# Altium PCB ballbot_motor_discrete_v22.PcbDoc
Units mil, origin at the board's own origin, x right, y up, seen from the top; angles counter-clockwise.
Board outline 1970 x 1970 mil, 4 copper layers (Top Layer, Mid-Layer 1, Mid-Layer 2, Bottom Layer), stack 68.592 mil thick; 60 components, 44 nets, 252 pads, 97 vias.
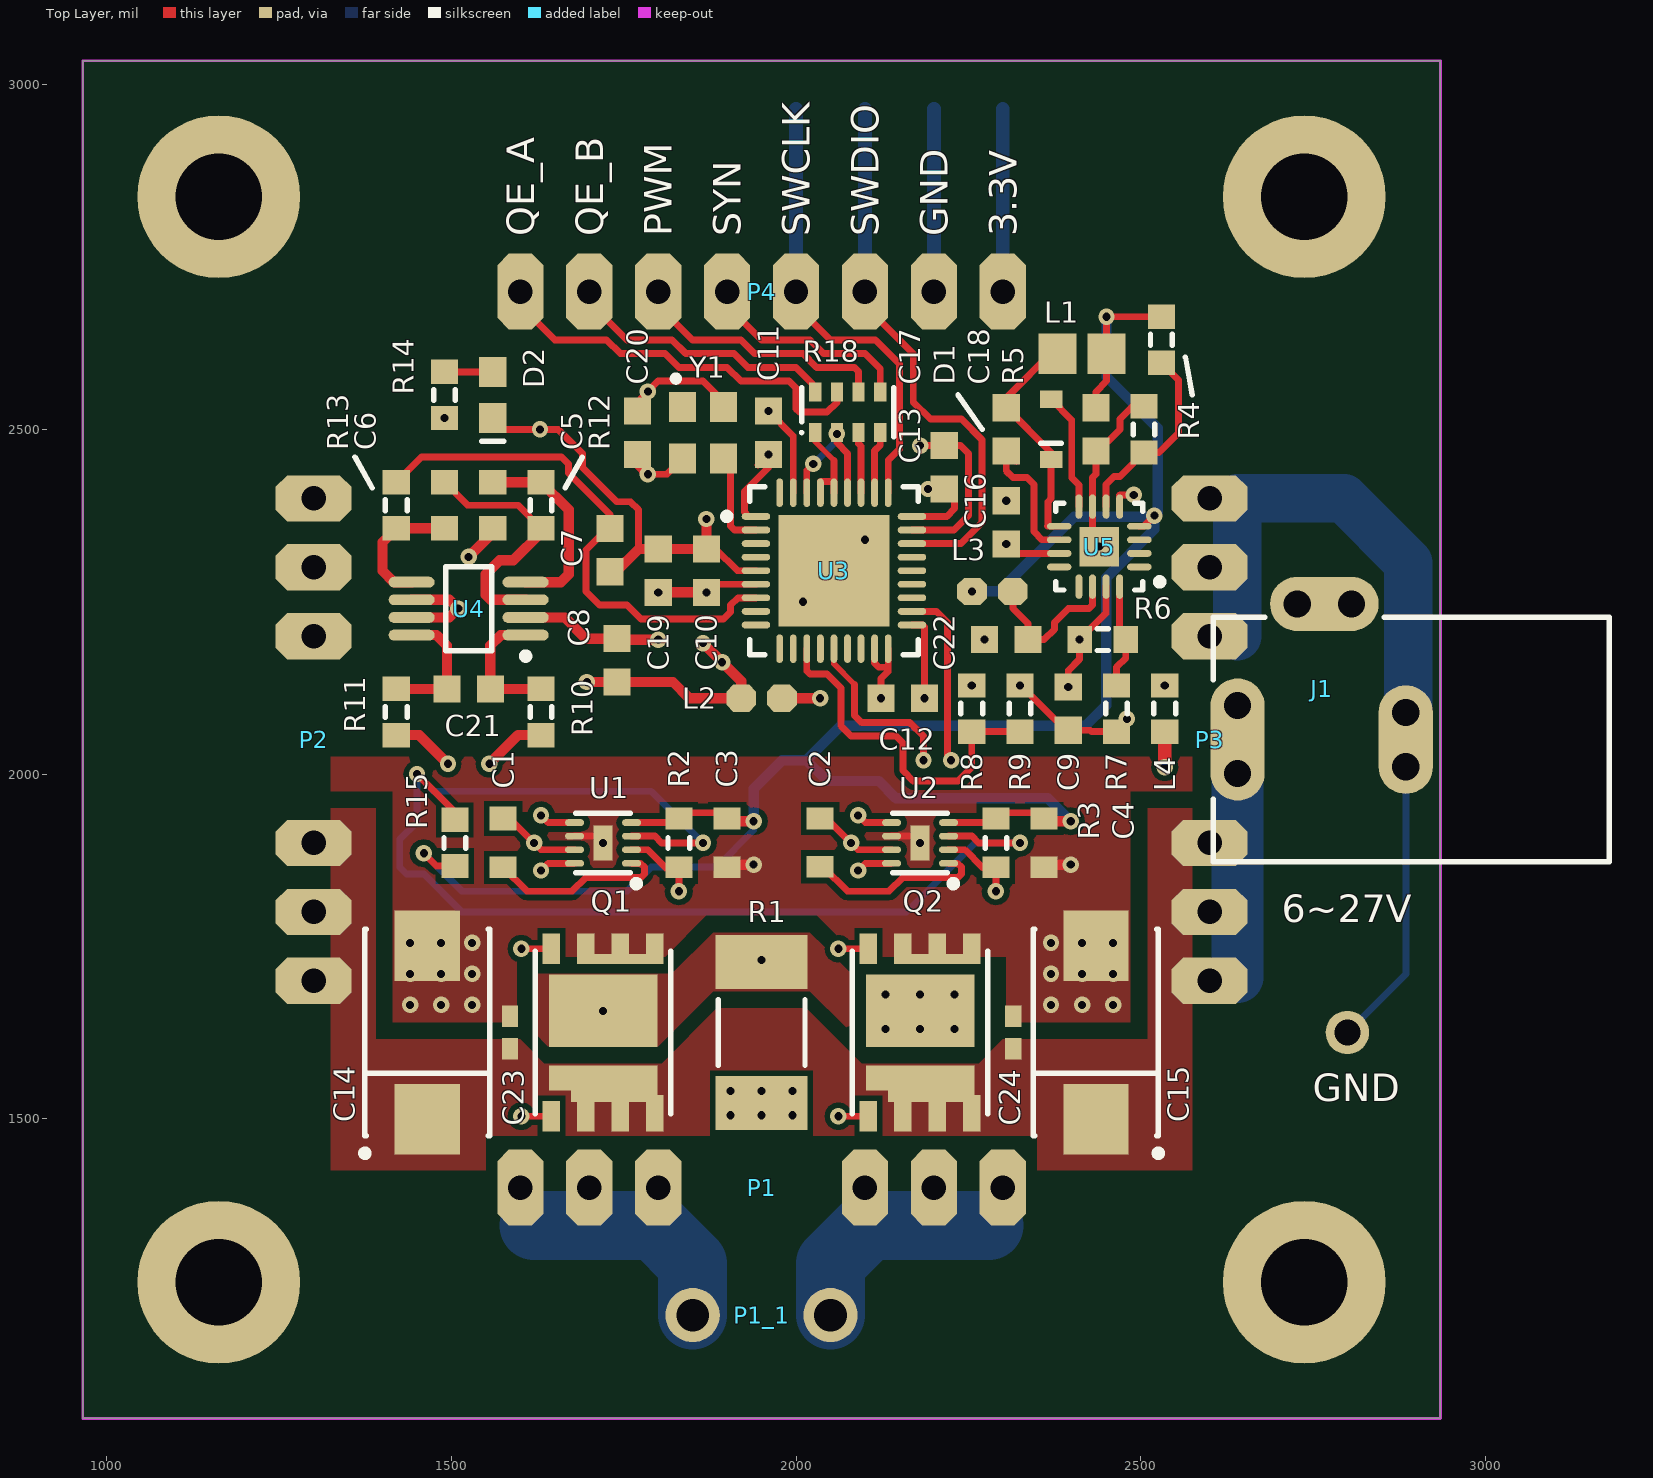
[diagram p0: Top Layer view]
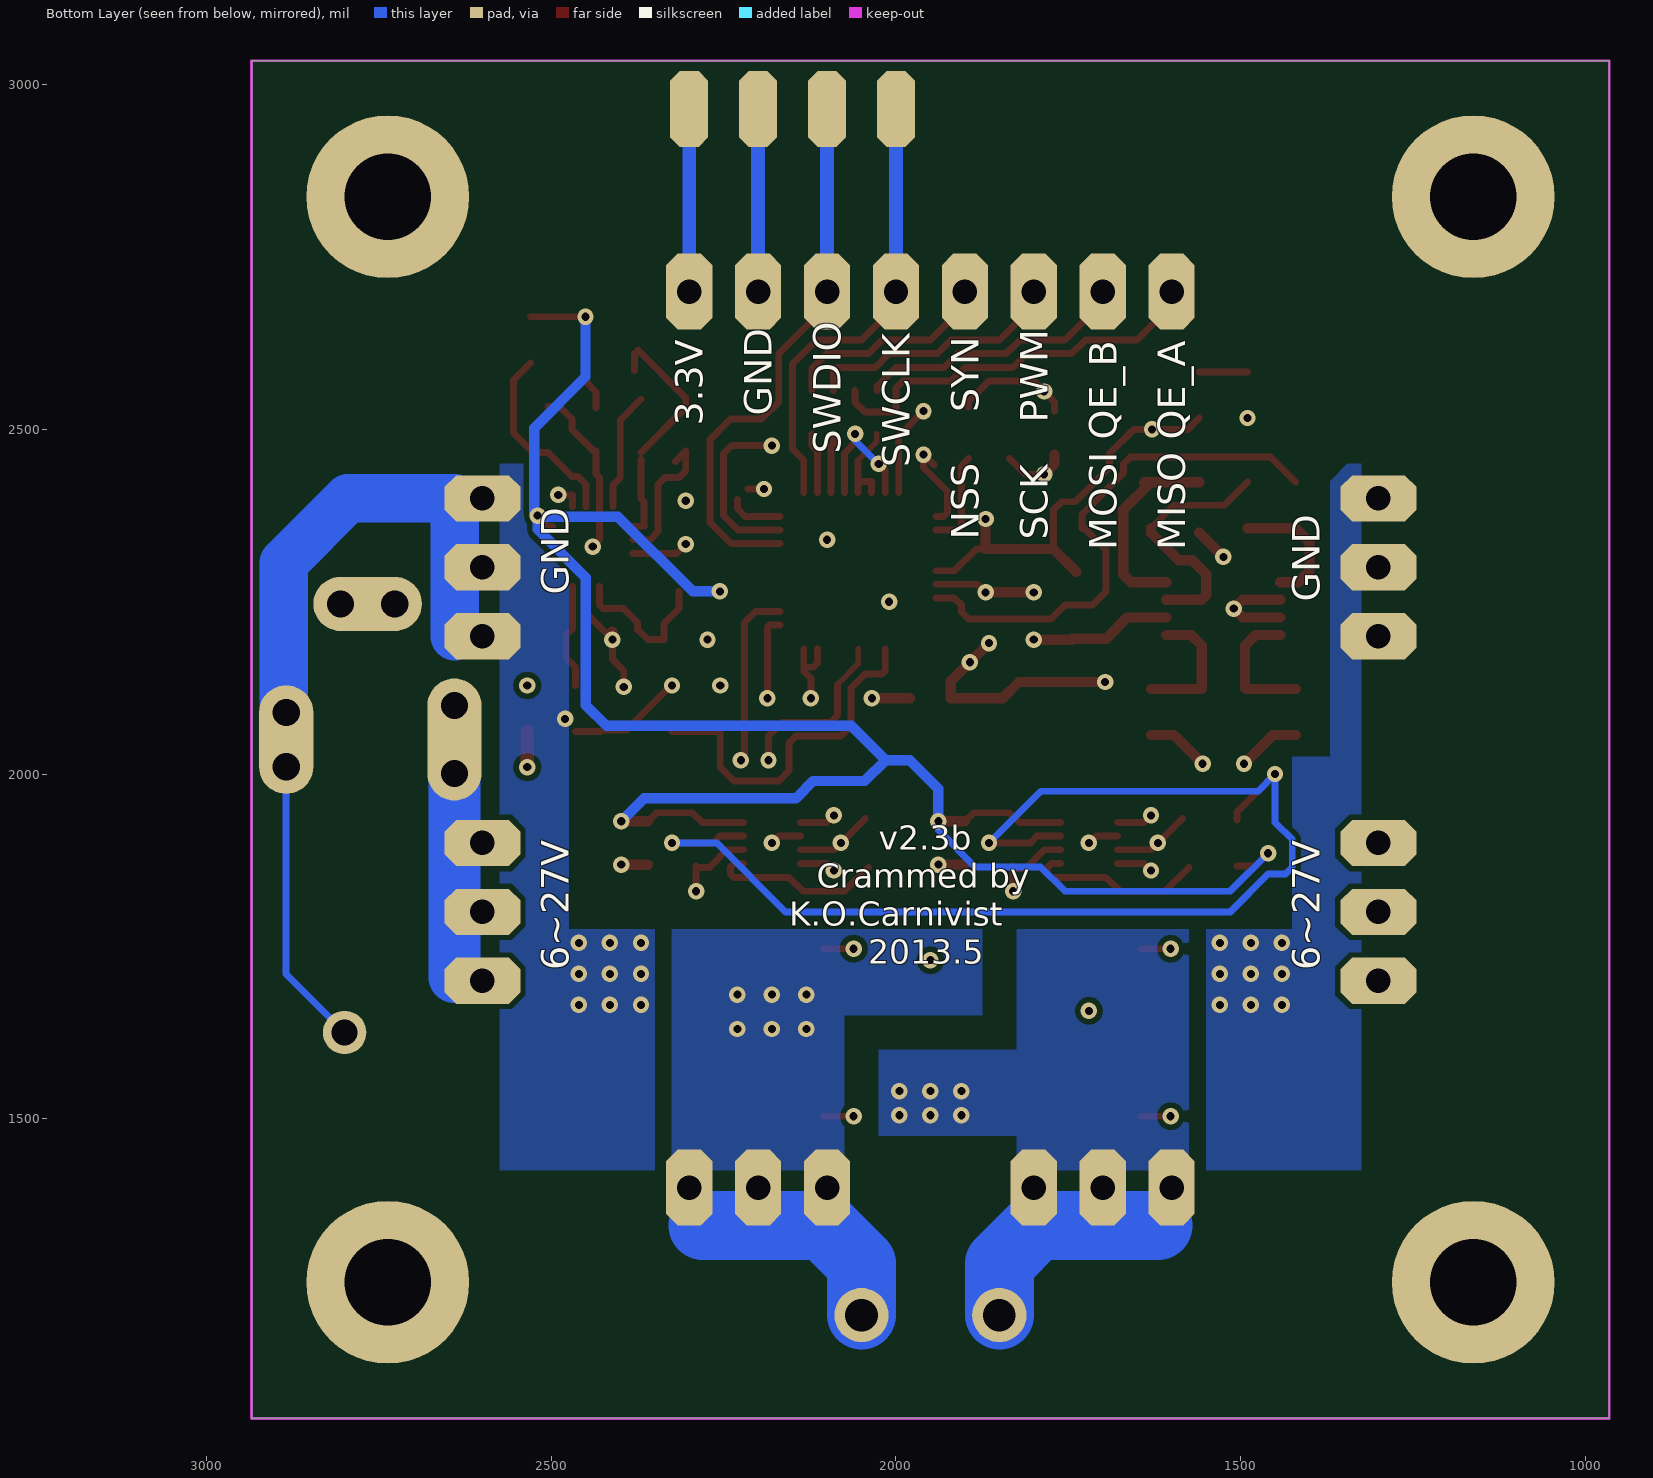
[diagram p1: Bottom Layer view, seen from below]
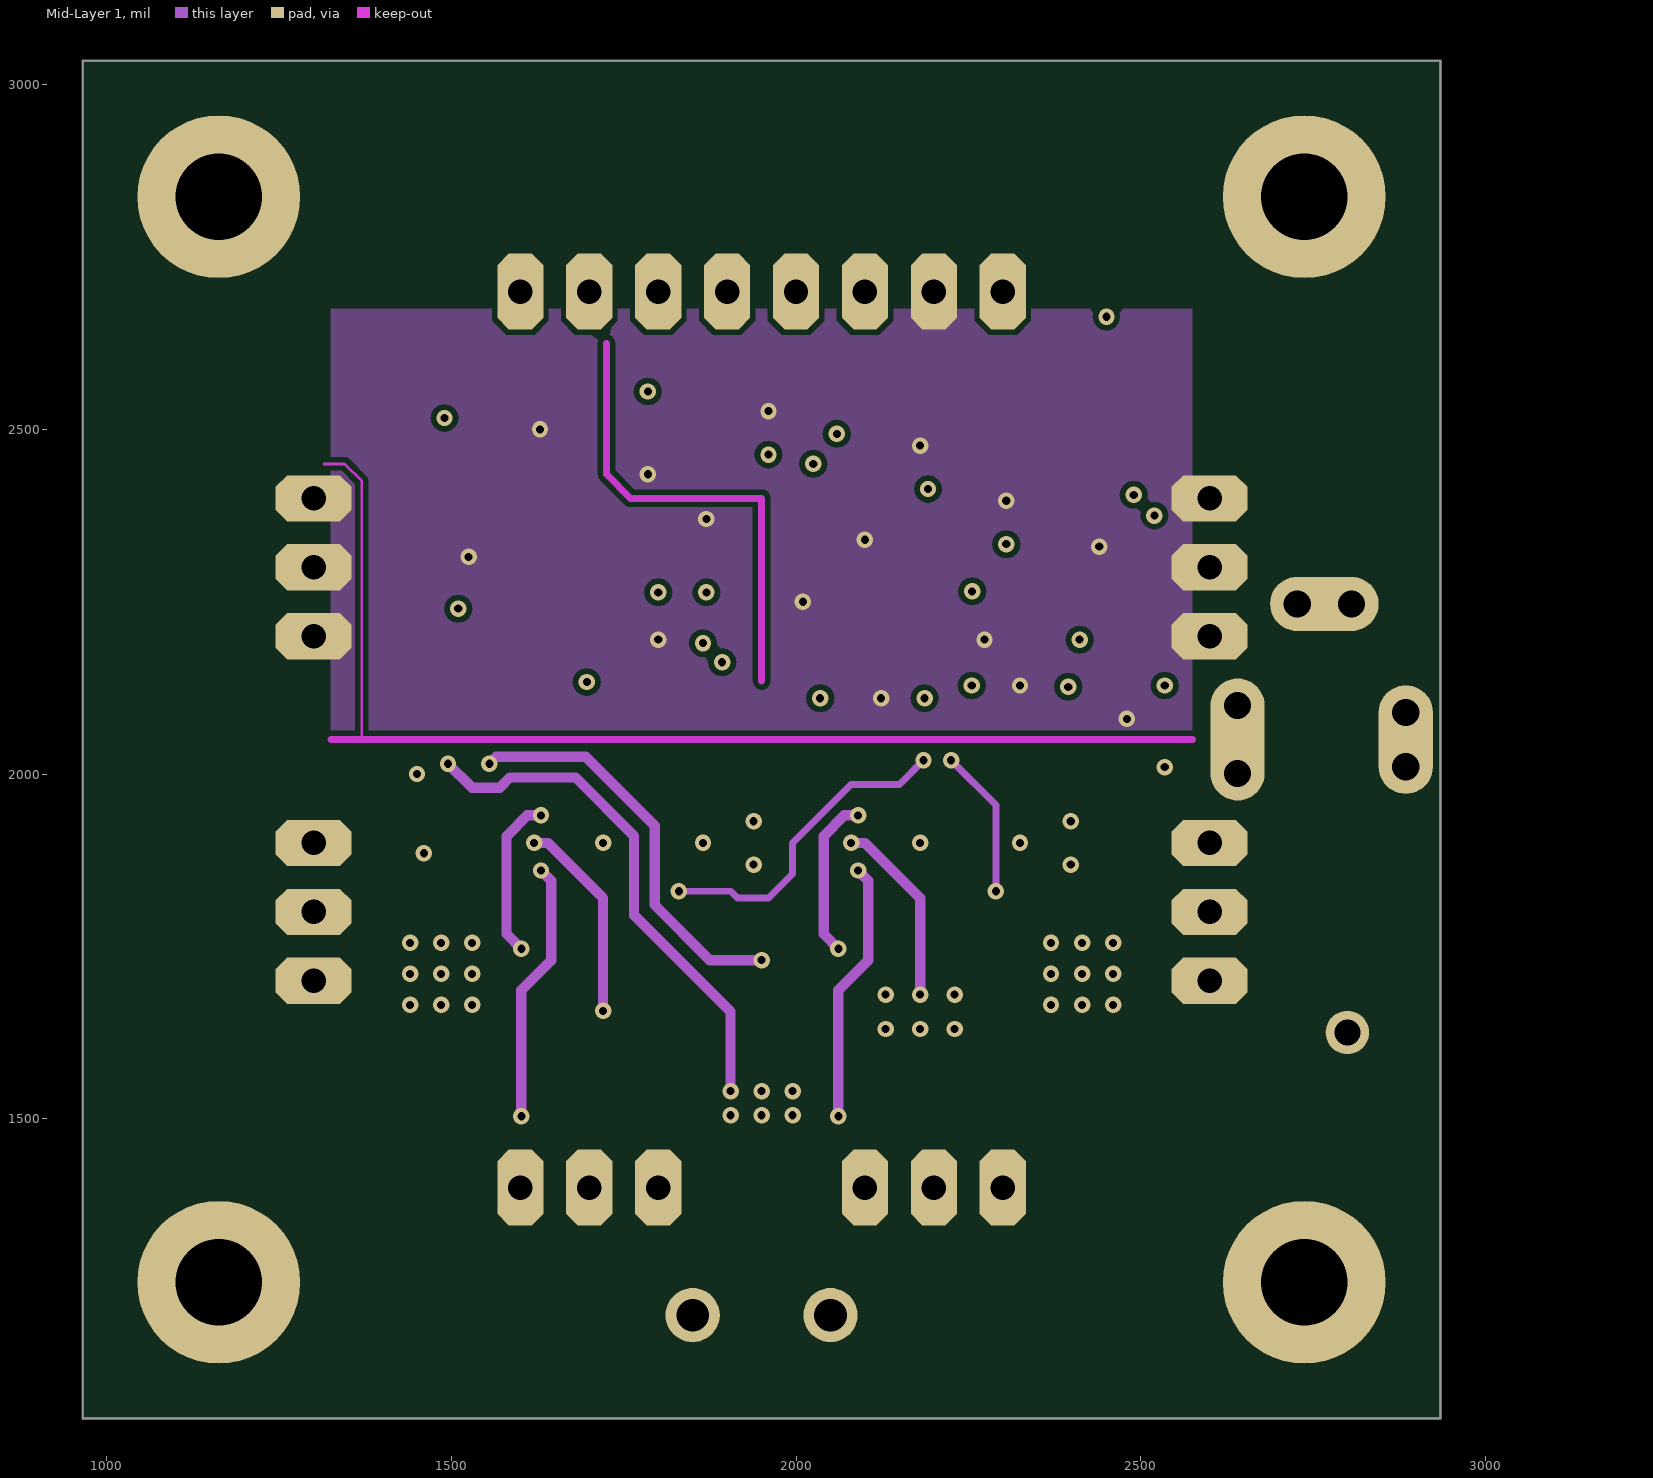
[diagram p2: Mid-Layer 1]
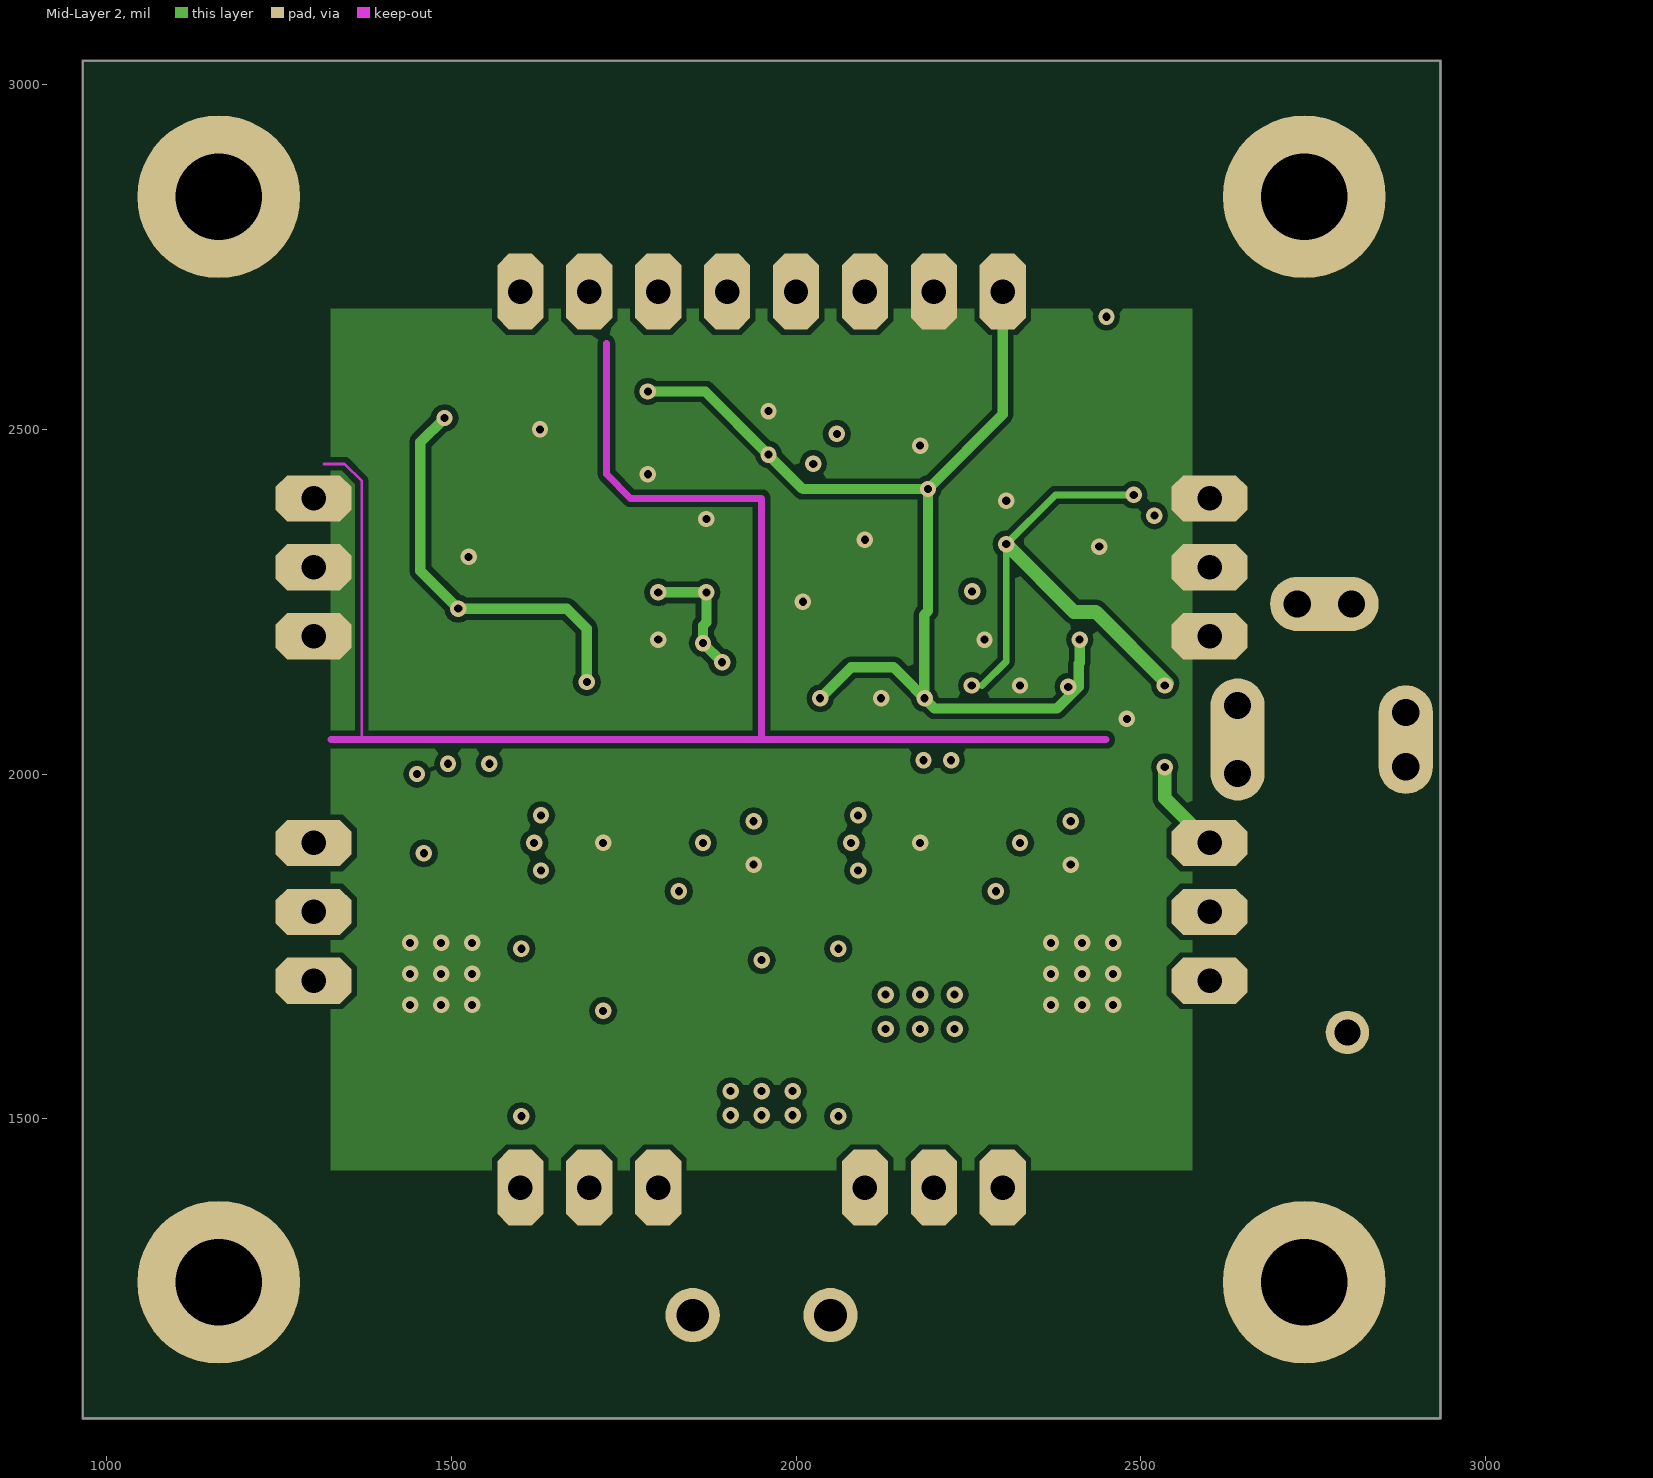
[diagram p3: Mid-Layer 2]

## Layer stack, top to bottom
Top Layer: signal copper 1.4
Dielectric: core 19.685, FR-4, Dk 4.8
Mid-Layer 1: signal copper 1.4
Dielectric: prepreg 23.622, FR-4, Dk 4.8
Mid-Layer 2: signal copper 1.4
Dielectric: core 19.685, FR-4, Dk 4.8
Bottom Layer: signal copper 1.4

## Board outline
965,1065 965,3035 2935,3035 2935,1065

## Design rules (kind name [scope] priority, off if disabled: settings)
Clearance [All] p1: gap=8
ComponentClearance [All] p1: gap=0 collisioncheckmode=3 verticalgap=0 showdistances=FALSE
PolygonConnect PolygonConnect_Motor [(InNet('NetP1_1') OR InNet('NetP1_7')  OR          InNet('VS')       OR InNet('GND'))] p1: connectstyle=Direct reliefconductorwidth=10 reliefentries=4 polygonreliefangle="90 Angle"
PolygonConnect [All] p2: connectstyle=Direct reliefconductorwidth=10 reliefentries=4 polygonreliefangle="90 Angle"
RoutingVias [All] p1: holewidth=28 width=50 viastyle="Through Hole" minholewidth=11.81 minwidth=25 maxholewidth=28 maxwidth=50
SilkscreenOverComponentPads [All] p1: minsilkscreentomaskgap=10
SolderMaskExpansion [All] p1: expansion=4
Width [All] p1: maxlimit=100 minlimit=6 preferedwidth=10
26 further rules are at their usual default settings.

## Components (designator, comment, footprint, x,y, rotation, side; value= is the part's Value field where it differs from the comment)
C1 "Cap Semi" CAPC1608N#1 1575,1900 r270 top
C2 "Cap Semi" CAPC1608N#2 2035,1900 r270 top
C3 "Cap Semi" CAPC1608N#3 1900,1900 r90 top
C4 "Cap Semi" CAPC1608N#3 2360,1900 r90 top
C5 "Cap Semi" CAPC1608N#4 1560,2390 r90 top
C6 "Cap Semi" CAPC1608N#4 1490,2390 r90 top
C7 "Cap Semi" CAPC1608N#5 1730,2325 r90 top
C8 "Cap Semi" CAPC1608N#5 1740,2165 r270 top
C9 "Cap Semi" CAPC1608N#5 2395,2095 r90 top
C10 "Cap Semi" CAPC1608N#5 1870,2295 r270 top
C11 "Cap Semi" CAPC1608N#5 1960,2495 r270 top
C12 "Cap Semi" CAPC1608N#5 2155,2110 r0 top
C13 "Cap Semi" CAPC1608N#5 2215,2445 r270 top
C14 "Cap Pol3" TC7343-2917 1465,1625 r90 top
C15 "Cap Pol3" TC7343-2917 2435,1625 r90 top
C16 "Cap Semi" CAPC1608N#5 2305,2365 r270 top
C17 "Cap Semi" CAPC1608N#5 2305,2500 r270 top
C18 "Cap Semi" CAPC1608N#5 2435,2500 r90 top
C19 "Cap Semi" CAPC1608N#5 1800,2295 r270 top
C20 "Cap Semi" CAPC1608N#5 1770,2495 r90 top
C21 "Cap Semi" CAPC1608N#5 1525,2123.47 r180 top
C22 "Cap Semi" CAPC1608N#5 2305,2195 r0 top
C23 "Cap Semi" CAPC1005N 1585,1625 r270 top
C24 "Cap Semi" CAPC1005N 2315,1625 r270 top
D1 "1N5819" SOD323 2370,2500 r270 top
D2 "LED2" CD1608-0603 1560,2550 r270 top
J1 "PWR2.5" KLD-0202 3180,2050 r180 top
L1 "Inductor" INDC2012N 2415,2610 r0 top
L2 "Bead" INDC1608AN 1950,2110 r180 top
L3 "Bead" INDC1608AN 2285,2265 r180 top
L4 "" RESC1608N#1 2535,2095 r90 top
P1 "MOTOR" "2.54mm * 8-6 Edge" 1950,1400 r0 top
P1_1 "Header 2" 508x2 1950,1215 r0 top
P2 "POWER" "2.54mm * 8-6 Edge" 1300,2050 r270 top
P3 "POWER" "2.54mm * 8-6 Edge" 2600,2050 r90 top
P4 "IO" "2.54mm * 8 Edge" 1950,2700 r180 top
Q1 "FDMS7602" DFN56 1720,1625 r0 top
Q2 "FDMS7602" DFN56 2180,1625 r0 top
R1 "" RESC6432N 1950,1625 r270 top
R2 "" RESC1608N#2 1830,1900 r270 top
R3 "" RESC1608N#2 2290,1900 r270 top
R4 "" RESC1608N#1 2530,2630 r270 top
R5 "" RESC1608N#1 2505,2500 r90 top
R6 "" RESC1608N#1 2445,2195 r0 top
R7 "" RESC1608N#1 2465,2095 r270 top
R8 "" RESC1608N#1 2255,2095 r270 top
R9 "" RESC1608N#1 2325,2095 r90 top
R10 "" RESC1608N#1 1630,2090 r90 top
R11 "" RESC1608N#1 1420,2090 r90 top
R12 "" RESC1608N#1 1630,2390 r270 top
R13 "" RESC1608N#1 1420,2390 r270 top
R14 "" RESC1608N#1 1490,2550 r90 top
R15 "" RESC1608N#1 1505,1900 r90 top
R18 "49.9R" EXBV8V 2075,2525 r0 top
U1 "NCP5911" SON50P200X200X80-8N 1720,1900 r180 top
U2 "NCP5911" SON50P200X200X80-8N 2180,1900 r180 top
U3 "STM32F103T8U6" VFQN36_N_STM32 2055,2295 r0 top
U4 "LMP8602" TSOP65P490-8AN 1525,2240 r180 top
U5 "LT3645" QFN50P300X300-16W7N 2440,2330 r180 top
Y1 "12MHz" "XTAL 2520" 1865,2495 r270 top

## Footprints (in the part's own frame and the unit in brackets; to place one, negate y for a bottom-side part, rotate by r counter-clockwise, add the part's x,y. Pads: shape width x height; smd on the part's side, far side on the other; paste and mask are expansions set on the pad)
"2.54mm * 8 Edge" [mm]
  oct 1.7x2.8 hole 0.9: 1(-8.89,0) 2(-6.35,0) 3(-3.81,0) 4(-1.27,0) 5(1.27,0) 6(3.81,0) 7(6.35,0) 8(8.89,0)
"2.54mm * 8-6 Edge" [mm]
  oct 1.7x2.8 hole 0.9: 1(-8.89,0) 2(-6.35,0) 3(-3.81,0) 4(3.81,0) 5(6.35,0) 6(8.89,0)
508x2 [mm]
  round 2 hole 1.2: 1(-2.54,0) 2(2.54,0)
CAPC1005N [mm] "Chip Capacitor, Body 1.0x0.5mm, IPC Medium Density"
  rect 0.8x0.6 smd: 1(-0.6,0) 2(0.6,0)
  body extent -0.55,-0.3 0.55,0.3, height 0.6
CAPC1608N#1 [mm] "Chip Capacitor, Body 1.6x0.8mm, IPC Medium Density"
  rect 0.873x1 smd: 1(-0.902,0)
  rect 0.797x1 smd: 2(0.902,0)
  body extent -0.87,-0.48 0.87,0.48, height 0.85
CAPC1608N#2 [mm] "Chip Capacitor, Body 1.6x0.8mm, IPC Medium Density"
  rect 0.797x1 smd: 1(-0.902,0) 2(0.876,0)
  body extent -0.87,-0.48 0.87,0.48, height 0.85
CAPC1608N#3 [mm] "Chip Capacitor, Body 1.6x0.8mm, IPC Medium Density"
  rect 0.797x1 smd: 1(-0.902,0) 2(0.902,0)
  body extent -0.87,-0.48 0.87,0.48, height 0.85
CAPC1608N#4 [mm] "Chip Capacitor, Body 1.6x0.8mm, IPC Medium Density"
  rect 0.898x1 smd: 1(-0.851,0) 2(0.851,0)
  body extent -0.87,-0.48 0.87,0.48, height 0.85
CAPC1608N#5 [mm] "Chip Capacitor, Body 1.6x0.8mm, IPC Medium Density"
  rect 1x1 smd: 1(-0.8,0) 2(0.8,0)
  body extent -0.87,-0.48 0.87,0.48, height 0.85
CD1608-0603 [mm] "Chip Diode; Body 1.6 x 0.8 mm (LxW typ)"
  rect 1.1x1 smd: 1(-0.85,0) 2(0.85,0)
  silkscreen extent 1.7,-0.4 1.7,0.4
DFN56 [mm]
  rect 0.65x1.34 smd mask+0.051: D1(-0.635,-2.98) D1(0.635,-2.98) D1(1.905,-2.98)
  rect 4x0.92 smd mask+0.051: D1(0,-1.67)
  rect 3.18x0.44 smd mask+0.051: D1(0.41,-2.34)
  rect 0.65x1.13 smd mask+0.051: G1(-1.905,-3.085) G2(-1.905,3.085) S2(-0.635,3.085) S2(0.635,3.085) S2(1.905,3.085)
  rect 4x2.67 smd mask+0.051: S1D2(0,0.795)
  rect 3.19x0.38 smd mask+0.051: S2(0.635,2.71)
  silkscreen extent -2.5,-3 2.5,3, body extent -2.5,-3 2.5,3, height 0.9
EXBV8V [mm] "Chip Resistor Array, (0603x4); SM; 8 Leads; Body 3.40 x 1.80 mm (LxW max)"
  rect 0.45x0.7 smd mask+0.051: 1(-1.2,-0.75) 2(-0.4,-0.75) 3(0.4,-0.75) 4(1.2,-0.75) 5(1.2,0.75) 6(0.4,0.75) 7(-0.4,0.75) 8(-1.2,0.75)
  silkscreen extent -1.75,-0.9 1.7,0.9
INDC1608AN [mm] "Chip Inductor, Body 1.6x0.8mm, IPC Medium Density"
  oct 1.1x1 smd: 1(-0.75,0) 2(0.75,0)
  body extent -0.9,-0.5 0.9,0.5, height 1
INDC2012N [mm] "Chip Inductor, Body 2.0x1.2mm, IPC Medium Density"
  rect 1.4x1.5 smd: 1(-0.9,0) 2(0.9,0)
  body extent -1.1,-0.7 1.1,0.7, height 1.1
KLD-0202 [mm] "DC Power Jack, 2.5mm, KLD Series, PCB Mount"
  oval 2x4.5 all layers, no hole: 1(13.7,0)
  round 1.5 hole 1: 1A(13.7,-1.25) 1B(13.7,1.25) 2A(7.5,-1) 2B(7.5,1) 3A(9.5,-5) 3B(11.5,-5)
  oval 2x4 all layers, no hole: 2(7.5,0)
  oval 4x2 all layers, no hole: 3(10.5,-5)
  silkscreen extent 0,-4.5 14.6,4.5
QFN50P300X300-16W7N [mm] "QFN, 16-Leads, Body 3x3mm, Pitch 0.5mm, IPC Medium Density"
  oval 0.9x0.25 smd mask+0.051: 1(-1.475,0.75) 2(-1.475,0.25) 3(-1.475,-0.25) 4(-1.475,-0.75) 9(1.475,-0.75) 10(1.475,-0.25) 11(1.475,0.25) 12(1.475,0.75)
  oval 0.25x0.9 smd mask+0.051: 5(-0.75,-1.475) 6(-0.25,-1.475) 7(0.25,-1.475) 8(0.75,-1.475) 13(0.75,1.475) 14(0.25,1.475) 15(-0.25,1.475) 16(-0.75,1.475)
  rect 1.45x1.45 smd mask+0.051: 17(0,0)
  silkscreen extent -2.35,-1.6 1.6,1.6, body extent -1.58,-1.58 1.58,1.58, height 0.8
RESC1608N#1 [mm] "Chip Resistor, Body 1.6x0.8mm, IPC Medium Density"
  rect 0.9x1 smd: 1(-0.85,0) 2(0.85,0)
  silkscreen extent -0.2,-0.4 0.2,0.4, body extent -0.85,-0.48 0.85,0.48, height 0.6
RESC1608N#2 [mm] "Chip Resistor, Body 1.6x0.8mm, IPC Medium Density"
  rect 0.797x1 smd: 1(-0.902,0) 2(0.902,0)
  silkscreen extent -0.2,-0.4 0.2,0.4, body extent -0.85,-0.48 0.85,0.48, height 0.6
RESC6432N [mm] "Chip Resistor, Body 6.4x3.2mm, IPC Medium Density"
  rect 2x3.4 smd: 1(-2.6,0) 2(2.6,0)
  silkscreen extent -1.2,-1.6 1.2,1.6, body extent -3.3,-1.7 3.3,1.7, height 1.2
SOD323 [mm] "Diode SOD323"
  rect 0.63x0.83 smd: 1(-1.112,0) 2(1.112,0)
  silkscreen extent 0.51,-0.38 0.51,0.38, body extent -0.76,-0.51 0.76,0.51, height 1
SON50P200X200X80-8N [mm] "SON, 8-Leads, Body 2x2 mm, Pitch 0.5mm, IPC Medium Density"
  oval 0.7x0.25 smd mask+0.051: 1(-1.05,0.75) 2(-1.05,0.25) 3(-1.05,-0.25) 4(-1.05,-0.75) 5(1.05,-0.75) 6(1.05,-0.25) 7(1.05,0.25) 8(1.05,0.75)
  rect 0.7x1.3 smd mask+0.051: 9(0,0)
  silkscreen extent -1.35,-1.1 1,1.62, body extent -1,-1 1,1, height 0.8
TC7343-2917 [mm] "Capacitor, SM Tantalum; Body 7.3 x 4.3 mm (LxW typ)"
  rect 2.6x2.4 smd: 1(-3.2,0) 2(3.2,0)
  silkscreen extent -4.57,-2.3 3.8,2.42
TSOP65P490-8AN [mm] "TSOP, 8-Leads, Body 3x3mm, Pitch 0.65mm, IPC Medium Density"
  oval 1.7x0.4 smd mask+0.051: 1(-2.1,0.975) 2(-2.1,0.325) 3(-2.1,-0.325) 4(-2.1,-0.975) 5(2.1,-0.975) 6(2.1,-0.325) 7(2.1,0.325) 8(2.1,0.975)
  silkscreen extent -2.22,-1.55 0.85,1.87, body extent -1.6,-1.6 1.6,1.6, height 1.1
VFQN36_N_STM32 [mm] "QFN, 36-Leads, Body 6x6mm, Pitch 0.5mm, IPC Medium Density"
  oval 1.05x0.25 smd mask+0.05: 1(-2.875,2) 2(-2.875,1.5) 3(-2.875,1) 4(-2.875,0.5) 5(-2.875,0) 6(-2.875,-0.5) 7(-2.875,-1) 8(-2.875,-1.5) 9(-2.875,-2) 19(2.875,-2) 20(2.875,-1.5) 21(2.875,-1) 22(2.875,-0.5) 23(2.875,0) 24(2.875,0.5) 25(2.875,1) 26(2.875,1.5) 27(2.875,2)
  oval 0.25x1.05 smd mask+0.05: 10(-2,-2.875) 11(-1.5,-2.875) 12(-1,-2.875) 13(-0.5,-2.875) 14(0,-2.875) 15(0.5,-2.875) 16(1,-2.875) 17(1.5,-2.875) 18(2,-2.875) 28(2,2.875) 29(1.5,2.875) 30(1,2.875) 31(0.5,2.875) 32(0,2.875) 33(-0.5,2.875) 34(-1,2.875) 35(-1.5,2.875) 36(-2,2.875)
  rect 4.1x4.1 smd mask+0.05: 36(0,0)
  silkscreen extent -4.07,-3.1 3.1,3.1, body extent -3.08,-3.08 3.08,3.08, height 1
"XTAL 2520" [mm] "Quartz Crystal, SM; Body 2.5 x 2.0 mm (LxW max)"
  rect 1.1x1 smd: 1(-0.95,-0.75) 2(0.95,-0.75) 3(0.95,0.75) 4(-0.95,0.75)
  silkscreen extent -2.1,-1.1 -1.9,-0.9, body extent -1.25,-1 1.25,1, height 0.6

## Part data
C1 C2 C3 C4 C5 C6 C7 C8 C9 C10 C11 C12 C13 C16 C17 C18 C19 C20 C21 C22 C23 C24: "Capacitor (Semiconductor SIM Model)"
C14 C15: "Polarized Capacitor (Surface Mount)"
D1: library part "D Schottky", "Schottky Diode"
D2: "Typical RED, GREEN, YELLOW, AMBER GaAs LED"
J1: "Low Voltage Power Supply Connector"
L2 L3: library part Inductor, "Inductor"
L4 R1 R2 R3 R4 R5 R6 R7 R8 R9 R10 R11 R12 R13 R14 R15: library part Res2, "Resistor"
P1 P2 P3: library part "Header 6", "Header, 6-Pin"
P1_1: "Header, 2-Pin"
P4: library part "Header 8", "Header, 8-Pin"
Q1 Q2: library part "Dual NMOS"
R18: library part "Header 4X2", "Header, 4-Pin, Dual row"
U3: "STM32 ARM-based 32-bit MCU with 64 Kbytes Flash, 36-pin VFQFPN, Industrial Temperature"
U4: library part LMP8603
Y1: library part Oscillator, "Oscillator"

## Free pads (board coordinates)
  round 236.22 hole 125.98: 0(1162.5,1262.5) 0(1162.5,2837.5) 0(2737.5,1262.5) 0(2737.5,2837.5)
  oct 55.12x110.24 smd far side: 0(2000,2965) 0(2100,2965) 0(2200,2965) 0(2300,2965)
  round 62.99 hole 37.4: 0(2800,1625)

## Via types
v1: diameter 23.81, hole 11.81, Top Layer to Bottom Layer, tented both sides, 97 vias

## Nets (pads, with @x,y where several pads share a name; then routed paths per layer and width w, separated by ;. In a path a pad name is that pad's centre, name@x,y a point inside that pad or via, vN(x,y) a via of type N, cw(c..) or ccw(c..) an arc to the next point about the centre after c; other vN are vias at no path point)
+3.3V: C9.2 C11.2 C12.2 C13.2 C20.2 L2.1 P4.1 pad.0@2300,2965 R6.1 U3.1 U3.19 U3.27 U5.15 Y1.4 | length 2711.2
  Top Layer w10: C20.2 1770,2540 v1(1785,2555) 1800,2570 1865,2570 1894.53,2540.47 Y1.4 ; U3.1 1931.26,2373.74 1925,2380 1925,2410 1960,2445 v1(1960,2463.5) C11.2@1945,2448.5 ; U3.19 2183.74,2216.26 2186.5,2213.5 v1(2186.5,2110) ; U3.27 2218.74,2373.74 2230,2385 C13.2@2230,2398.5 ; v1(2191.5,2413.5) C13.2 ; P4.1@2272.83,2680.47 P4.1@2272.83,2715.91 ; v1(2395,2126.5) 2395,2150 2411.54,2166.54 v1(2411.54,2195) 2449.84,2233.31 U5.15
  Top Layer w15: L2.1 v1(2035,2110)
  Mid-Layer 2 w15: v1(1785,2555) 1868.5,2555 v1(1960,2463.5) 2010,2413.5 v1(2191.5,2413.5) ; v1(2035,2110) 2080,2155 2141.5,2155 2201.5,2095 2378.5,2095 2410,2126.5 2410,2160 2411.54,2161.54 v1(2411.54,2195) ; v1@2185.81,2110 2185.81,2230.81 2191.5,2236.5 v1(2191.5,2413.5) ; P4.1 2300,2522.01 v1(2191.5,2413.5)
  Bottom Layer w10: P4.1@2280,2660 2300,2680 P4.1
  Bottom Layer w20: P4.1 pad.0@2300,2965
+3.3VA: C8.2 C10.2 C19.2 L2.2 R14.1 U3.6 U4.6 U4.7 | length 1403.8
  Top Layer w10: v1(1870,2263.5) 1881.81,2275.32 U3.6
  Top Layer w15: U4.7 1497.2,2227.2 v1(1510,2240) 1497.2,2252.8 U4.6 ; v1(1696.5,2133.5) C8.2 1821.5,2133.5 1845,2110 L2.2 1920.47,2134.53 v1(1892.74,2162.26) v1(1865,2190) ; v1(1800,2263.5) v1(1870,2263.5)
  Mid-Layer 2 w15: v1(1490,2516.54) 1455,2481.54 1455,2295 v1(1510,2240) 1667.2,2240 1696.5,2210.71 v1(1696.5,2133.5) ; v1(1800,2263.5) v1(1870,2263.5) 1870,2220 1865,2215 v1(1865,2190) v1(1892.74,2162.26)
+5V: C3.2 C4.2 C18.2 L1.2 L3.2 R2.1 R3.1 R4.1 R15.1 U1.4 U2.4 U5.4 | length 3190.7
  Top Layer w10: v1(1460,1885) 1478.46,1866.54 R15.1 ; U1.4 1820.73,1929.53 1835,1943.8 1887.7,1943.8 C3.2@1900,1931.5 ; U2.4 2280.73,1929.53 2295,1943.8 2347.7,1943.8 C4.2@2360,1931.5 ; C18.2 2435,2554.57 2450.43,2570 v1(2450.43,2663.47) R4.1 ; U5.4 2504.53,2359.53 v1(2520,2375)
  Top Layer w15: C3.2@1900,1931.5 v1(1938.5,1931.5) ; C4.2@2360,1931.5 v1(2398.5,1931.5)
  Bottom Layer w10: v1(1460,1885) 1515,1830 1755,1830 1790,1865 1885,1865 1938.5,1918.5 v1(1938.5,1931.5)
  Bottom Layer w15: v1(1938.5,1931.5) 1938.5,1978.5 1980,2020 2015,2020 ; v1(2255.47,2265) 2295,2265 2403.5,2373.5 2518.5,2373.5 v1(2520,2375) ; v1(2398.5,1931.5) 2365,1965 2145,1965 2120,1990 2045,1990 2015,2020 ; v1(2450.43,2663.47) 2450.43,2576.1 2525,2501.54 2525,2380 v1(2520,2375) ; 2015,2020 2065,2070 2420,2070 2450,2100 2450,2285 2520,2355 v1(2520,2375)
EN_DRV: R15.2 U1.3 U2.3 | length 1874.9
  Top Layer w10: v1(1450,2000) 1505,1945 R15.2 ; U1.3 1795.16,1909.84 1805,1900 v1(1865,1900) ; U2.3 2255.16,1909.84 2265,1900 v1(2325,1900)
  Bottom Layer w10: v1(1865,1900) 1790,1975 1475,1975 v1(1450,2000) 1450,1930 1425,1905 1425,1865 1435,1855 1460,1855 1515,1800 2160,1800 2260,1900 v1(2325,1900)
ENC_A: R18.2 U3.31 U3.34 | length 195.1
  Top Layer w10: U3.34 2015.63,2440.63 v1(2025,2450) ; v1(2059.25,2493.5) 2059.25,2480.75 2074.68,2465.32 U3.31
  Bottom Layer w10: v1(2025,2450) 2059.25,2484.25 v1(2059.25,2493.5)
ENC_B: R18.1 U3.32 U3.33 | length 132.9
  Top Layer w8: R18.1@2027.76,2493.5 2027.76,2482.24 2055,2455
  Top Layer w10: U3.33 2035.31,2424.69 2054.69,2424.69 U3.32@2055,2425 ; U3.32 U3.32@2055,2425 ; 2055,2455 U3.32@2055,2425
GND: C3.1 C4.1 C5.1 C7.1 C8.1 C9.1 C10.1 C11.1 C12.1 C13.1 C14.2 C15.2 C16.1 C18.1 C19.1 C20.1 C22.1 C23.1 C24.1 D2.2 J1.2 J1.2A J1.2B P2.1 P2.2 P2.3 P3.4 P3.5 P3.6 P4.2 pad.0@2200,2965 pad.0@2800,1625 Q1.S2 Q2.S2 R5.2 R7.2 R9.2 U1.6 U1.9 U2.6 U2.9 U3.5 U3.17 U3.18 U3.26 U3.35 U3.36@2055,2295 U4.2 U5.7 U5.17 Y1.2 | length 3474.3
  Top Layer w10: D2.2 1576.54,2500 v1(1628.46,2500) 1655,2500 1690,2465 1690,2445 1740,2395 1760,2395 1771.5,2383.5 1771.5,2326.5 ; U1.6 U1.9@1710.16,1909.84 ; v1(1785,2435) 1812.87,2435 Y1.2 ; C10.1 1883.5,2326.5 1915,2295 U3.5 ; v1(1960,2526.5) 1995.94,2490.55 U3.35 ; U3.17 2114.06,2160.94 2120,2155 2133.74,2155 ; v1(2123.5,2110) 2123.5,2138.5 2133.74,2148.74 2133.74,2155 ; U3.18 2133.74,2155 ; U2.6 U2.9@2170.16,1909.84 ; U3.26 2229.06,2354.06 2250,2375 2250,2465 2238.5,2476.5 C13.1 v1(2180,2476.5) ; R9.2@2325.77,2129.23 C9.1@2391.5,2063.5 ; C9.1 2426.5,2063.5 2428.46,2061.54 R7.2 ; U5.17@2430.16,2339.84 U5.7 2430.16,2430.16 2435,2435 C18.1 2438.5,2468.5 2470,2500 2470,2515 2488.46,2533.46 R5.2
  Top Layer w15: v1(1525,2315) C5.1@1560,2350 ; U4.2 1664.29,2227.2 1695,2196.5 C8.1@1743.5,2196.5 ; C7.1@1738.5,2293.5 1771.5,2326.5 C19.1 C10.1 v1(1870,2370) ; C8.1@1745,2195 v1(1800,2195) ; C20.1 1770,2450 v1(1785,2435) ; C3.1@1900,1868.5 v1(1938.5,1868.5) ; C4.1@2360,1868.5 v1(2398.5,1868.5)
  Bottom Layer w10: pad.0@2800,1625 2884.72,1709.72 J1.2B
  Bottom Layer w20: P4.2 pad.0@2200,2965
  Bottom Layer w70: P3.4@2640,2200 2640,2400 2795,2400 2888.35,2306.65 2888.35,2014.26 J1.2B
  other v1: 1440,1665 1485,1665 1530,1665 2370,1665 2415,1665 2460,1665 1440,1710 1485,1710 1530,1710 2370,1710 2415,1710 2460,1710 1440,1755 1485,1755 1530,1755 2370,1755 2415,1755 2460,1755 1720,1900 2180,1900 2480,2080 2325,2128.46 2273.5,2195 2010,2250 2440,2330 2100,2340 2305,2396.5
I_CMP: C6.2 R12.2 U4.3 | length 369.8
  Top Layer w10: C6.2 1523.5,2390 1596.54,2390 R12.2
  Top Layer w15: U4.3 1557.2,2252.8 1550,2260 1550,2290 1570,2310 1590,2310 1630,2350 R12.2
I_SENSE: C7.2 R13.1 U3.7 | length 774.1
  Top Layer w10: R13.1 1456.54,2460 1660,2460 1670,2450 1670,2436.5 1730,2376.5 C7.2 ; C7.2@1726.5,2356.5 1695,2325 1695,2265 1715,2245 1755,2245 1775,2225 1895,2225 1905,2235 1905,2245 1915.63,2255.63 U3.7
IS+: C21.2 R11.2 U4.8 | length 190.9
  Top Layer w15: R11.2 C21.2@1491.97,2123.46 ; U4.8 1478.39,2201.61 1493.5,2186.5 C21.2@1493.5,2125
IS-: C21.1 R10.2 U4.1 | length 192.4
  Top Layer w15: C21.1 R10.2 ; C21.1@1556.5,2125 1556.5,2186.5 1571.61,2201.61 U4.1
NetC1_1: C1.1 Q1.S1D2 R1.1 R10.1 U1.7 | length 1090.7
  Top Layer w10: C1.1@1584.5,1935.5 v1(1620,1900) 1629.84,1890.16 U1.7
  Top Layer w15: v1(1555,2015) 1596.54,2056.54 R10.1
  Mid-Layer 1 w15: v1(1555,2015) 1565,2025 1695,2025 1795,1925 1795,1810 1875,1730 v1(1950,1730) ; v1(1620,1900) 1640,1900 1720,1820 v1(1720,1656.3)
NetC1_2: C1.2 U1.1 | length 260.6
  Top Layer w10: C1.2 1609.5,1830 1675,1830 1695,1850 1775,1850 1780,1855 1780,1865 1774.53,1870.47 U1.1
NetC2_1: C2.1 P1.4 P1.5 P1.6 P1_1.2 Q2.S1D2 U2.7 | length 718.4
  Top Layer w10: C2.1@2044.5,1935.5 v1(2080,1900) ; v1@2075.5,1900 v1(2080,1900) ; U2.7 2089.84,1890.16 v1(2080,1900)
  Mid-Layer 1 w15: v1(2080,1900) 2100,1900 2180,1820 v1(2180,1680)
  Bottom Layer w100: P1_1.2 2050,1290 2105,1345 2280,1345
  other v1: 2130,1630 2180,1630 2230,1630 2130,1680 2230,1680
NetC2_2: C2.2 U2.1 | length 255.6
  Top Layer w10: C2.2@2040,1864.5 2074.5,1830 2135,1830 2155,1850 2235,1850 2240,1855 2240,1865 2234.53,1870.47 U2.1
NetC5_2: C5.2 R12.1 U4.4 | length 297.2
  Top Layer w15: C5.2 R12.1@1639.97,2423.5 ; U4.4 1658.39,2278.39 1670,2290 1670,2383.46 R12.1
NetC6_1: C6.1 R13.2 U4.5 | length 189
  Top Layer w15: U4.5 1416.61,2278.39 1400,2295 1400,2336.47 R13.2 C6.1
NetC17_1: C17.1 D1.2 L1.1 U5.9 | length 344.5
  Top Layer w10: U5.9@2365,2360 U5.9@2365.47,2359.53 ; D1.2 2370,2399.53 2365.47,2395 U5.9@2365.47,2359.53 ; D1.2@2370,2466.5 C17.1 2305,2545.43 L1.1@2374.57,2615 ; L1.1@2379.57,2585.43 L1.1 ; U5.9 U5.9@2365.47,2359.53
NetC17_2: C17.2 U5.10 | length 208.1
  Top Layer w10: C17.2@2320,2453.5 C17.2 2305,2440 2315,2430 2335,2430 2345,2420 2345,2351.77 2356.93,2339.84 U5.10
NetC22_2: C22.2 L3.1 U5.14 | length 226.2
  Top Layer w10: L3.1 2314.53,2240.47 2336.5,2218.5 C22.2 2360,2195 2375,2210 2375,2220 2395,2240 2425,2240 2430.16,2245.16 U5.14
NetD1_1: D1.1 U5.8 | length 172.5
  Top Layer w10: D1.1 2400,2513.8 2400,2430 2410.47,2419.53 U5.8
NetD2_1: D2.1 R14.2 | length 70
  Top Layer w10: R14.2 D2.1
NetJ1_3: J1.3 J1.3A J1.3B
NetP1_1: P1.1 P1.2 P1.3 P1_1.1 R1.2 R11.1 | length 1173.9
  Top Layer w15: R11.1 1453.46,2056.54 v1(1495,2015)
  Mid-Layer 1 w15: v1(1495,2015) 1530,1980 1570,1980 1585,1995 1680,1995 1765,1910 1765,1795 1905,1655 v1(1905,1540)
  Bottom Layer w100: 1620,1345 1795,1345 1850,1290 P1_1.1
  other v1: 1905,1505 1950,1505 1995,1505 1950,1540 1995,1540
NetP4_5: P4.5 R18.5 | length 311.7
  Top Layer w10: P4.5 1900,2680 1950,2630 2020,2630 2040,2610 2100,2610 2122.24,2587.76 R18.5@2122.24,2556.5
NetP4_6: P4.6 R18.6 | length 378.2
  Top Layer w10: P4.6 1800,2680 1850,2630 1920,2630 1940,2610 2010,2610 2030,2590 2085,2590 2090.75,2584.25 R18.6@2090.75,2556.5
NetP4_7: P4.7 R18.8 | length 399.4
  Top Layer w10: P4.7 1700,2685 1755,2630 1820,2630 1840,2610 1910,2610 1930,2590 2000,2590 2027.76,2562.24 R18.8@2027.76,2556.5
NetP4_8: P4.8 R18.7 | length 584.2
  Top Layer w10: P4.8 1600,2680 1650,2630 1725,2630 1745,2610 1810,2610 1830,2590 1900,2590 1920,2570 1990,2570 2000,2560 2000,2530 2005,2525 2045,2525 2059.25,2539.25 R18.7@2059.25,2556.5
NetQ1_G1: Q1.G1 U1.8 | length 477.2
  Top Layer w10: v1(1601.46,1503.54) Q1.G1 ; v1(1630,1860) 1640.47,1870.47 U1.8
  Mid-Layer 1 w15: v1(1601.46,1503.54) 1601.46,1686.46 1645,1730 1645,1845 v1(1630,1860)
NetQ1_G2: Q1.G2 U1.5 | length 331.4
  Top Layer w10: v1(1601.46,1746.46) Q1.G2 ; v1(1630,1940) 1640.47,1929.53 U1.5
  Mid-Layer 1 w15: v1(1601.46,1746.46) 1580,1767.91 1580,1910 1610,1940 v1(1630,1940)
NetQ2_G1: Q2.G1 U2.8 | length 477.2
  Top Layer w10: v1(2061.46,1503.54) Q2.G1 ; v1(2090,1860) 2100.47,1870.47 U2.8
  Mid-Layer 1 w15: v1(2061.46,1503.54) 2061.46,1686.46 2105,1730 2105,1845 v1(2090,1860)
NetQ2_G2: Q2.G2 U2.5 | length 331.4
  Top Layer w10: v1(2061.46,1746.46) Q2.G2 ; v1(2090,1940) 2100.47,1929.53 U2.5
  Mid-Layer 1 w15: v1(2061.46,1746.46) 2040,1767.91 2040,1910 2070,1940 v1(2090,1940)
NetR4_2: R4.2 R5.1 U5.6 | length 280
  Top Layer w10: U5.6 2449.84,2419.84 2461.54,2431.54 2470,2431.54 R5.1 2526.54,2466.54 2555,2495 2555,2571.54 R4.2
NetR6_2: R6.2 R7.1 U5.16 | length 152.7
  Top Layer w10: R7.1 2465,2155 2478.46,2168.46 R6.2 2478.46,2201.54 2469.53,2210.47 U5.16
NetU3_2: U3.2 Y1.3 | length 141.2
  Top Layer w10: Y1.3 1905,2447.13 1905,2360 1910.94,2354.06 U3.2
PWM1: R2.2 U1.2 U3.14 | length 841.7
  Top Layer w8: U3.14 2055,2160 2085,2130
  Top Layer w10: U1.2 1784.84,1890.16 1812.5,1862.5 R2.2@1830,1862.5 ; v1(1830,1830) R2.2@1830,1862.5 ; R2.2@1830,1866.54 R2.2@1830,1862.5 ; 2085,2130 2085,2085 2095,2075 2165,2075 2185,2055 v1(2185,2020)
  Mid-Layer 1 w10: v1(1830,1830) 1905,1830 1915,1820 1960,1820 1995,1855 1995,1900 2080,1985 2150,1985 v1(2185,2020)
PWM2: R3.2 U2.2 U3.20 | length 593.2
  Top Layer w10: U3.20 2204.06,2235.94 2220,2220 2220,2025 v1(2225,2020) ; U2.2 2244.84,1890.16 2270.5,1864.5 R3.2 ; v1(2290,1830) R3.2@2290,1866.54
  Mid-Layer 1 w10: v1(2225,2020) 2290,1955 v1(2290,1830)
PWM_IN: R18.3 U3.30 | length 86.8
  Top Layer w10: R18.3@2090.75,2493.5 2090.75,2479.25 2094.37,2475.63 U3.30
SPI_NSS: R18.4 U3.29 | length 88.7
  Top Layer w10: U3.29 2114.06,2469.06 2122.24,2477.24 R18.4@2122.24,2493.5
SWCLK: P4.4 pad.0@2000,2965 U3.28 | length 663.8
  Top Layer w10: P4.4 2000,2680 2050,2630 2115,2630 2150,2595 2150,2471.26 2133.74,2455 U3.28
  Bottom Layer w20: P4.4 pad.0@2000,2965
SWDIO: P4.3 pad.0@2100,2965 U3.25 | length 811.3
  Top Layer w10: P4.3 2100,2680 2170,2610 2170,2540 2195,2515 2240,2515 2270,2485 2270,2365 2239.37,2334.37 U3.25
  Bottom Layer w20: P4.3 pad.0@2100,2965
VS: C14.1 C15.1 C23.2 C24.2 J1.1 J1.1A J1.1B L4.1 P2.4 P2.5 P2.6 P3.1 P3.2 P3.3 Q1.D1 Q2.D1 | length 582.7
  Top Layer w20: v1(2535,2010) L4.1
  Mid-Layer 2 w20: v1(2535,2010) 2535,1965 P3.3
  Bottom Layer w75: P3.1@2640.63,1705 J1.1B J1.1 J1.1A
VS_SENSE: R8.2 R9.1 U3.12 | length 523.3
  Top Layer w10: U3.12 2015.63,2149.37 2020,2145 2045,2145 2065,2125 2065,2070 2080,2055 2145,2055 2155,2045 2155,2005 2170,1990 2235,1990 2255,2010 R8.2 R9.1
VSA: C16.2 L4.2 R8.1 U5.5 U5.11 | length 870.6
  Top Layer w10: v1(2305,2333.5) 2318.35,2320.16 U5.11 ; U5.5 2469.53,2404.53 2470,2405 v1(2490,2405)
  Mid-Layer 2 w10: 2270,2128.46 2305,2163.46 v1(2305,2333.5) 2376.5,2405 v1(2490,2405)
  Mid-Layer 2 w20: v1(2305,2333.5) 2403.5,2235 2435,2235 v1@2538.27,2131.73
  other v1: 2255,2128.46 2535,2128.46
pads on no net: U3.3 U3.4 U3.8 U3.9 U3.10 U3.11 U3.13 U3.15 U3.16 U3.21 U3.22 U3.23 U3.24 U3.36@1976.26,2408.19 U5.1 U5.2 U5.3 U5.12 U5.13 Y1.1

## Polygon pours and split planes (outlines as drawn)
GND on Mid-Layer 1 "Mid1 - Ground" (solid, remove dead copper, pour order 18): 1325,2675 1325,2050 2575,2050 2575,2675
GND on Mid-Layer 2 "MidLayer2 - Ground" (solid, remove dead copper, pour order 15): 1325,2675 2575,2675 2575,1425 1325,1425
GND on Top Layer "Top - PowerGND" (solid, remove dead copper, pour order 17): 1325,2025 1325,1975 1415,1975 1415,1640 1595,1640 1595,1735 1810,1735 1870,1795 2030,1795 2090,1735 2305,1735 2305,1640 2485,1640 2485,1975 2575,1975 2575,2025
VS on Top Layer "Mid1 - Ground" (solid, remove dead copper, pour order 10): 1325,1950 1390,1950 1390,1615 1600,1615 1635,1580 1805,1580 1885,1660 2015,1660 2095,1580 2265,1580 2300,1615 2510,1615 2510,1950 2575,1950 2575,1425 2350,1425 2350,1475 1550,1475 1550,1425 1325,1425
NetC1_1 on Top Layer "Mid1 - Ground" (solid, remove dead copper, pour order 13): 1620,1710 1620,1625 1640,1605 1800,1605 1880,1685 2020,1685 2080,1625 2080,1690 2080,1710 2020,1770 1880,1770 1820,1710
GND on Bottom Layer "Bottom - GND_Left" (solid, remove dead copper, pour order 12): 1325,2450 1345,2450 1370,2425 1370,2025 1425,2025 1425,1775 1550,1775 1550,1425 1325,1425
NetP1_1 on Bottom Layer "Bottom - Out1" (solid, remove dead copper, pour order 16): 2025,1600 1825,1600 1825,1775 1575,1775 1575,1425 1825,1425 1825,1475 2025,1475
NetC2_1 on Bottom Layer "Bottom - Out2" (solid, remove dead copper, pour order 14): 1875,1650 1875,1775 2325,1775 2325,1425 2075,1425 2075,1650
GND on Bottom Layer "Bottom - GND_Right" (solid, remove dead copper, pour order 11): 2575,2450 2475,2450 2475,2025 2475,1775 2350,1775 2350,1425 2575,1425

## Keep-outs
Mid-Layer 1:
  lines w4: 1315,2450 1345,2450 1370,2425 1370,2050
  lines w10: 1325,2050 2575,2050 ; 1725,2625 1725,2435 1760,2400 1950,2400 1950,2135
Mid-Layer 2:
  lines w4: 1315,2450 1345,2450 1370,2425 1370,2050
  lines w10: 1325,2050 2450,2050 ; 1725,2625 1725,2435 1760,2400 1950,2400 1950,2050
Keep-Out Layer:
  the board outline again, w4

## Silkscreen, mask and mechanical layers (free items; w line width, h text height)
Top Overlay:
  lines w7.87: 1360,2460 1385,2415 ; 1665,2415 1690,2460 ; 2235,2550 2270,2500 ; 2565,2605 2575,2550
  text "QE_A" at 1620,2780 h40 r90
  text "QE_B" at 1720,2780 h40 r90
  text "PWM" at 1820,2780 h40 r90
  text "SYN" at 1920,2780 h40 r90
  text "SWCLK" at 2020,2780 h40 r90
  text "SWDIO" at 2120,2780 h40 r90
  text "GND" at 2220,2780 h40 r90
  text "3.3V" at 2320,2780 h40 r90
  text "6~27V" at 2705,1785 h40
  text "GND" at 2750,1525 h40
Bottom Overlay:
  text "SYN" at 1880,2525 h40 r270
  text "GND" at 2180,2520 h40 r270
  text "PWM" at 1780,2510 h40 r270
  text "3.3V" at 2280,2505 h40 r270
  text "QE_A" at 1580,2485 h40 r270
  text "QE_B" at 1680,2485 h40 r270
  text "SWDIO" at 2080,2465 h40 r270
  text "SWCLK" at 1980,2445 h40 r270
  text "SCK" at 1780,2340 h40 r270
  text "NSS" at 1880,2340 h40 r270
  text "MISO" at 1580,2325 h40 r270
  text "MOSI" at 1680,2325 h40 r270
  text "GND" at 2475,2260 h40 r270
  text "GND" at 1385,2250 h40 r270
  text "v2.3b" at 2025,1890 h35
  text "Crammed by" at 2115,1835 h35
  text "K.O.Carnivist" at 2155,1780 h35
  text "2013.5" at 2040,1725 h35
  text "6~27V" at 1385,1715 h40 r270
  text "6~27V" at 2475,1715 h40 r270
Mechanical 15:
  lines w4: 1300,1400 2600,1400 2600,2700 1300,2700 1300,1400

## Dimensions
965,1065 to 2935,1065 on Mechanical 15
2935,1065 to 2935,3035 on Mechanical 15
1300,1400 to 2600,1400 on Mechanical 15

## Text inside footprints (layer, text, board x,y; h text height)
J1: Mechanical 1 "Mech 2 - Clearance, move to internal plane if present" at 3168.74,1850.56 h11.81 r180; Mechanical 1 "Mech 1 - Slot cut-out" at 3168.74,1830.87 h11.81 r180; Mechanical 1 "Assign keep-out area to slot" at 3168.74,1791.5 h11.81 r180; Mechanical 1 "Alert PCB fab to slot details" at 3168.74,1811.18 h11.81 r180